# Altium PCB Dionysus.PcbDoc (part 2 of 2)
Units mil, origin at the board's own origin, x right, y up, seen from the top; angles counter-clockwise.
Board outline 4100 x 2100 mil, 4 copper layers (Component Side, Ground Plane, Power Plane, Solder Side); 123 components, 141 nets, 602 pads, 292 vias.
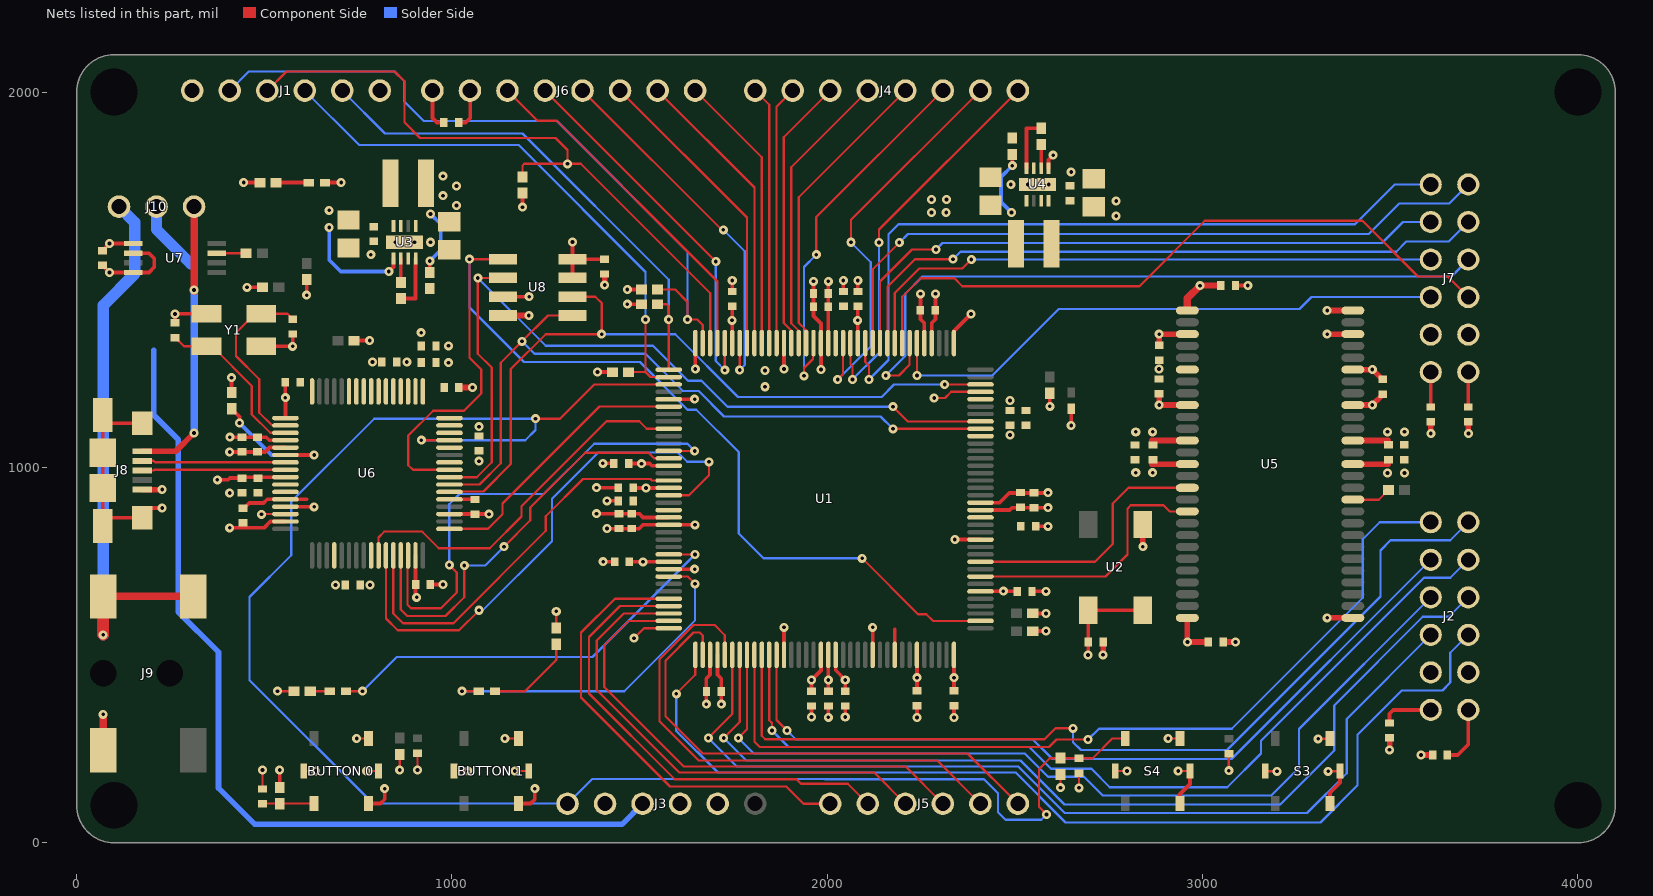
[diagram p4: the nets of this part, all layers, seen from the top]

## Via types
v1: diameter 24, hole 10, Component Side to Solder Side, 288 vias
v2: diameter 24, hole 10, Component Side to Solder Side, tented top, 4 vias

## Nets (pads, with @x,y where several pads share a name; then routed paths per layer and width w, separated by ;. In a path a pad name is that pad's centre, name@x,y a point inside that pad or via, vN(x,y) a via of type N, cw(c..) or ccw(c..) an arc to the next point about the centre after c; other vN are vias at no path point) (continued)
GND: "BUTTON 0.5" "BUTTON 0.6" "BUTTON 1.5" "BUTTON 1.6" C1.1 C2.1 C3.1 C4.1 C5.1 C6.1 C7.1 C8.1 C9.1 C10.1 C11.1 C12.1 C13.1 C14.1 C15.1 C16.1 C17.1 C18.1 C19.1 C20.1 C21.1 C22.1 C23.1 C24.1 C25.1 C26.1 C27.1 C28.1 C29.1 C30.1 C31.1 C32.1 C33.1 C34.1 C35.1 C36.1 C37.1 C38.1 C41.1 C42.1 C43.1 C44.1 C45.1 C46.1 C47.1 C48.1 C49.1 C50.1 C51.1 C52.1 C53.1 C54.1 C55.1 C56.1 C57.1 C58.1 C59.1 C60.1 C61.1 C62.1 C63.1 C64.1 C65.1 C66.1 C67.1 C74.1 C75.1 J1.6 J2.5 J2.11 J3.2 J3.3 J6.7 J7.5 J7.11 J8.5 J8.S J9.2 LED3.2 LED_POWER.2 R1.2 R2.2 R3.1 R4.1 R6.2 R13.2 R21.2 S3.3 S3.4 S3.5 S3.6 S4.3 S4.4 S4.5 S4.6 U1.3 U1.13 U1.25 U1.49 U1.54 U1.68 U1.73 U1.77 U1.91 U1.96 U1.108 U1.113 U1.130 U1.136 U1.144 U2.2 U3.2 U3.3 U3.9 U4.2 U4.3 U4.9 U5.6 U5.12 U5.28 U5.41 U5.46 U5.52 U5.54 U6.1 U6.5 U6.10 U6.11 U6.13 U6.15 U6.25 U6.35 U6.47 U6.51 U7.5 U8.4 Y1.2 Y1.4 | length 5857.2
  Component Side w6: C2.1@495.17,143.44 v1(495.17,193.76) ; v1(535,404) R1.2@579.35,404 ; 605.59,191 v1(637,191) ; v1(773,191) 804.41,191 ; v1(861,194) R3.1@861,235.35 ; v1@908,188.66 908.35,188.66 C1.1@908.35,238.63 ; 1005.59,191 v1@1042.43,191 ; v1@1167.57,191 1204.41,191 ; R2.2@1278,572.31 v1(1278,616.65) ; v1(1485,545) 1511.51,571.51 U1.144@1577.65,571.51 ; v1(2670.77,146.26) C75.1@2670.77,185.57 ; S4.5@2767.59,191 v1(2799,191) ; v1(2908.43,277.61) S4.4@2939.83,277.61 ; v1(2935,191) S4.6@2966.41,191 ; v1(3070,192) C74.1@3070,237.63 ; S3.5@3167.2,190.39 v1(3198.61,190.39) ; v1(3308.04,277) S3.4@3339.45,277 ; v1(3334.61,190.39) S3.6@3366.02,190.39
  Component Side w10: C52.1@69,1577.69 v1(87.7,1596.39) U7.5@150.78,1596.39 ; J8.S@69.69,844.36 J8.S@69.69,944.76 J8.S@69.69,1039.24 J8.S@69.69,1117.98 ; J8.S@71.7,866.02 J8.S@175,866.02 200.98,892 v1(228,892) ; J8.S@76.7,1117.98 J8.S@175,1117.98 ; C51.1@262,1385.68 v1(262,1409) ; v1@262.31,1409.31 Y1.2@346.17,1409.31 ; v1(408,839) 499,839 516.05,856.05 U6.15@556.5,856.05 ; v1(408,1041) 502,1041 513.9,1052.9 U6.5@556.5,1052.9 ; R13.2@413,1199.65 v1(413,1239) ; Y1.4@491.83,1322.69 v1(575.69,1322.69) ; R4.1@541,147.31 v1(541,194) ; v1(556,1186) C61.1@556,1226.69 ; U6.13@556.5,895.42 v1@627.58,895.42 ; U6.1@556.5,1131.64 v1@556.5,1179.5 ; v1@576,1323 C50.1@576,1356 ; LED_POWER.2@661.65,1759 v1(705,1759) ; R6.2@863.91,1493.75 U3.2@863.91,1556.69 ; C55.1@942.68,688 v1(976.37,688) ; U6.35@993.5,875.73 v1@1099,875.73 ; C28.1@1018,1919 1036.63,1919 1048.63,1931 J6.7@1048.63,2004 ; v1(1384.91,946) C4.1@1443.32,946 ; v1(1402.09,1010.91) C3.1@1431.41,1010.91 ; v1@1403.32,748.68 C5.1@1433.63,748.68 ; v1(1413,837) 1419,837 1499.04,836.98 1509.16,847.1 U1.130@1577.65,847.1 v1@1647.9,847.1 ; v1(1413,911) C15.1@1443.32,911 ; U1.136@1577.65,728.99 v1(1647,728.99) ; U1.113@1577.65,1181.75 v1(1647,1181.75) ; v1(1648.51,1262) U1.108@1648.51,1331.35 ; v1(1677.76,369.31) 1677.76,437.31 1687.88,447.43 U1.3@1687.88,500.65 ; C20.1@1746.94,1468.69 v1(1746.94,1498) ; U1.13@1884.73,500.65 v1@1884.73,574 ; v1(1884.73,1262) U1.96@1884.73,1331.35 ; v1(1958,335) C27.1@1958,364.31 ; v1@1963.09,1490.04 v1(1963.09,1496.04) ; v1@1963.35,1496.04 1963.35,1403.65 1983.16,1383.84 U1.91@1983.16,1331.35 v1@1983.16,1261.1 ; v1(2003,334.31) C16.1@2003,365 ; C18.1@2043,1468.69 v1(2043,1498) ; v1(2048,335) C13.1@2048,364.31 ; C14.1@2081.58,1468.69 v1(2081.58,1498) ; U1.25@2120.95,500.65 v1(2121,574) v1(2121,574) ; v1(2239.06,334) C25.1@2239.06,365.32 ; v1(2248.63,1462.69) 2248.63,1394.69 2258.75,1384.57 U1.77@2258.75,1331.35 ; v1(2337.49,334) C11.1@2337.49,365.32 ; U1.73@2337.49,1331.35 2337.49,1363.49 v1(2383,1409) ; v1(2340.01,807.73) U1.49@2408.35,807.73 ; U1.54@2408.35,906.16 2459.16,906.16 2485,932 v1@2588,932 ; C21.1@2545.68,669.94 2582.94,669.94 v1(2583,670) ; C17.1@2555.42,843.31 v1@2586.74,843.31 ; U4.2@2570.09,1797.31 R21.2@2570.09,1860.25 ; v1(2650,1112) LED3.2@2650,1156.35 ; S4.3@2939.83,104.39 2939.83,129.83 2966.41,156.41 S4.6@2966.41,191 ; C41.1@3087.89,1484.61 v1(3120.69,1484.61) ; S3.3@3339.45,103.77 3339.45,133.45 3366.02,160.02 S3.6@3366.02,190.39
  Component Side w15: J8.5@175,940.82 227.82,940.82 v1(228,941) ; C62.1@1018.68,1213 v1(1055,1213) ; U8.4@1136.48,1405 v1(1205,1405) ; v1(1407,1486) C67.1@1407,1515.31 ; v1@2735.02,500 C24.1@2735.02,534.66 ; v1(2840.83,789) U2.2@2840.83,848.17 ; 2865,1071.72 U5.12@2959.57,1071.72 ; C43.1@3054.71,534.98 v1(3087.51,534.98) ; v1(3332.18,599.28) U5.28@3400.52,599.28 ; v1(3332.18,1355.19) U5.52@3400.52,1355.19 ; v1(3332.18,1418.18) U5.54@3400.52,1418.18 ; U5.41@3400.52,1008.73 3495.09,1008.73 ; U5.46@3400.52,1166.21 v1(3452.21,1166.21) C48.1@3480.66,1194.66 ; v1(3498.32,247.63) C29.1@3498.32,278.94 ; v1(3581.68,234) C30.1@3613,234 ; v1(3608.32,1090.31) C31.1@3608.32,1121.63 ; v1(3708.32,1090.31) C32.1@3708.32,1121.63
  Component Side w20: J9.2@71,246.75 v1(71,342.39)
  other v1: 1042.43,190.61 1167.57,191.39 908.35,194 2734.68,500.69 1885,574 781.57,687 1403,749 2588,843 1647.8,847.2 1099,875.31 633,895 408,932 2588,932.69 3493.09,985.46 3538.09,985.46 2822,1095 2867,1095 1072,1108.69 2486.85,1178.48 1983.25,1261.2 2884,1262 991,1279 880,1281 991,1324 784,1567 943,1600 2489,1754 2650,1787
  other v2: 850,1600 900,1600 2535,1754 2590,1754
GPIOH0: U6.48
GPIOH1: U6.52
GPIOH2: U6.53
GPIOH3: U6.54
GPIOH4: U6.55
GPIOH5: U6.57
GPIOH6: U6.58
GPIOH7: U6.59
GPIOL1: U6.44
GPIOL2: C75.2 J3.6 R26.2 S4.1 U1.111 U6.45 | length 4838.8
  Component Side w6: v1(918.42,1072.58) U6.45@993.5,1072.58 ; v1(1223,1130) 1288,1130 1379,1221 U1.111@1577.65,1221 ; v1@2584.5,75.5 2564,96 2564,196 2592.94,224.94 C75.2@2670.77,224.94 ; C75.2@2670.77,225.26 2707.26,225.26 2759.61,277.61 S4.1@2794.17,277.61
  Solder Side w6: v1(918.42,1072.58) 1195.58,1072.58 1223,1100 v1(1223,1130) ; v1@1224,1130 v1(1223,1130) ; v1(2584,75) 2570,61 2475,61 2455,81 2455,132 2418,169 1994.75,169 1993.75,170 1374,170 1308.39,104.39 789.61,104.39 461,433 461,655 572,766 572,909 793,1130 v1(1223,1130)
GPIOL3: U6.46
LED0: "LED 0.1" U1.134 | length 1151.2
  Component Side w6: 717.65,404 v1(762,404) ; U1.134@1577.65,768.36 v1(1647.8,768.36)
  Solder Side w6: v1(762,404) 853,495 1374.44,495 v1(1647.8,768.36)
LED1: "LED 1.1" U1.137 | length 919
  Component Side w6: v1(1027,404) 1071.35,404 ; U1.137@1577.65,709.31 1628.69,709.31 v1(1648,690)
  Solder Side w6: v1(1027,404) 1459,404 1648,593 v1(1648,690)
"NetBUTTON 0_2": "BUTTON 0.2" C2.2 R4.2 | length 137.2
  Component Side w6: C2.2@495,104.39 632.17,104.39
NetC50_2: C50.2 U6.2 Y1.1 | length 483.5
  Component Side w6: Y1.1@475.31,1409.31 425,1359 425,1297 487,1235 487,1146 521,1112 542,1112 542.05,1111.95 U6.2@556.5,1111.95 ; Y1.1@491.83,1409.31 561.69,1409.31 C50.2@576,1395
NetC51_2: C51.2 U6.3 Y1.3 | length 428.7
  Component Side w6: C51.2@262.5,1346.5 286.31,1322.69 Y1.3@346.17,1322.69 ; Y1.3@361.31,1322.69 467,1217 467,1141 515.73,1092.27 U6.3@556.5,1092.27
NetJ9_1: J9.1 J10.1 | length 1535.6
  Component Side w20: J9.1@71,656.2 J9.1@311.16,656.2
  Component Side w30: v1(71,554) J9.1@71,656.2
  Solder Side w30: v1@70.92,554 70.92,1431.92 155,1516 155,1653 J10.1@113,1695
NetL1_1: L1.1 U3.7
NetL2_1: L2.1 U4.7
"NetLED 0_2": "LED 0.2" R1.1 | length 51.7
  Component Side w6: R1.1@622.65,404 674.35,404
"NetLED 1_2": "LED 1.2" R2.1 | length 239.7
  Component Side w6: 1114.65,404 1195,404 1278,487 R2.1@1278,529
NetLED_POWER_1: LED_POWER.1 R29.2 | length 86.7
  Component Side w10: R29.2@531.65,1759 LED_POWER.1@618.35,1759
NetR5_2: R5.2 R6.1 U3.4 | length 145.6
  Component Side w10: R6.1@864.35,1450 903.28,1450 U3.4@903.28,1556.69
NetR11_1: R11.1 U5.38 | length 105.1
  Component Side w6: U5.38@3400.52,914.24 3469.24,914.24 R11.1@3495,940
NetR13_1: R13.1 U6.6 | length 346.8
  Component Side w10: R13.1@413,1156.35 434.31,1135.04 v1(434.31,1118.31) ; U6.6@556.5,1033.21 v1@627.79,1033.21
  Solder Side w10: v1(434.31,1118.31) 519.61,1033 v1@627.57,1033
  other v1: 633,1033
NetR17_2: R17.2 U7.3 | length 80
  Component Side w6: U7.3@373.22,1570.59 R17.2@453.22,1570.59
NetR19_2: R19.2 R21.1 U4.4 | length 145.6
  Component Side w10: U4.4@2530.72,1797.31 2530.72,1904 R21.1@2569.65,1904
O\E\: U1.114 U6.33 | length 736
  Component Side w6: U6.33@993.5,836.36 1096.36,836.36 1135,875 1135,904 1393.06,1162.06 U1.114@1577.65,1162.06
PMODA1: J2.1 U1.9 | length 2378.9
  Component Side w6: U1.9@1805.99,500.65 1805.99,269.01 1820,255 2591,255 2611,275 v1(2695,275)
  Solder Side w6: v1(2695,275) 2724,304 3078,304 3427,653 3427,809 3472,854 J2.1@3608,854
PMODA2: J2.2 U1.12 | length 2179.7
  Component Side w6: U1.12@1865.05,500.65 1865.05,326.95 v1(1893,299)
  Solder Side w6: v1(1893,299) 1916,276 2547,276 2600,223 3077,223 J2.2@3608,754
PMODA3: J2.3 U1.8 | length 2418.7
  Component Side w6: v1(1763,279) 1786.31,302.31 U1.8@1786.31,500.65
  Solder Side w6: v1(1763,279) 1804,238 2526,238 2588,176 2684,176 2734,126 3183,126 3257,200 3257,303 J2.3@3608,654
PMODA4: J2.4 U1.6 | length 2537.7
  Component Side w6: v1(1683,279) 1746.94,342.94 U1.6@1746.94,500.65
  Solder Side w6: v1(1683,279) 1759,203 2509,203 2633,79 3278,79 3384,185 3384,330 J2.4@3608,554
PMODA7: J2.7 U1.10 | length 2482.7
  Component Side w6: U1.10@1825.68,500.65 1825.68,285.32 1835,276 2579,276 2608,305 v1(2655,305)
  Solder Side w6: v1(2655,305) 2655,268 2676,247 3065,247 3474,656 3474,779 3501,806 3660,806 J2.7@3708,854
PMODA8: J2.8 U1.11 | length 2393.3
  Component Side w6: U1.11@1845.36,500.65 1845.36,326.64 1853,319 v1(1853,299)
  Solder Side w6: v1(1853,299) 1897,255 2538,255 2596,197 2704,197 2753,148 3066,148 3156,238 3156,272 3590,706 3660,706 J2.8@3708,754
PMODA9: J2.9 U1.7 | length 2595.6
  Component Side w6: v1(1724,279) 1766.62,321.62 U1.7@1766.62,500.65
  Solder Side w6: v1(1724,279) 1784,219 2515,219 2632,102 3207,102 3351,246 3351,366 3587,602 3656,602 J2.9@3708,654
PMODA10: J2.10 U1.1 | length 2767.1
  Component Side w6: v1(1598,397) 1648.51,447.51 U1.1@1648.51,500.65
  Solder Side w6: v1(1598,397) 1598,298 1709,187 2502,187 2635,54 3314,54 3413,153 3413,288 3531,406 3639,406 3660,427 3660,506 J2.10@3708,554
PMODB1: J7.1 U1.85 | length 2010
  Component Side w6: U1.85@2101.27,1331.35 2101.27,1280.73 2111,1271 v1(2111,1234)
  Solder Side w6: v1(2111,1234) 2163,1286 2163,1621 2190,1648 3406,1648 3512,1754 J7.1@3608,1754
PMODB2: J7.2 U1.83 | length 1697.2
  Component Side w6: U1.83@2140.64,1331.35 2140.64,1495.64 2226,1581 v1(2290,1581)
  Solder Side w6: v1(2290,1581) 2307,1598 3478,1598 3534,1654 J7.2@3608,1654
PMODB3: J7.3 U1.81 | length 1598.5
  Component Side w6: U1.81@2180.01,1331.35 2180.01,1465.01 2245,1530 2360,1530 v1(2384,1554)
  Solder Side w6: v1(2384,1554) J7.3@3608,1554
PMODB4: J7.4 U1.78 | length 1542
  Component Side w6: v1(2239.06,1244.9) U1.78@2239.06,1331.35
  Solder Side w6: v1(2239.06,1244.9) 2439.9,1244.9 2617,1422 3258,1422 3290,1454 J7.4@3608,1454
PMODB7: J7.7 U1.84 | length 1877.3
  Component Side w6: U1.84@2120.95,1331.35 2120.95,1527.95 v1(2192,1599)
  Solder Side w6: v1(2192,1599) 2215,1622 3443,1622 3524,1703 3657,1703 J7.7@3708,1754
PMODB8: J7.8 U1.82 | length 1769.2
  Component Side w6: U1.82@2160.32,1331.35 2160.32,1481.32 2234,1555 v1(2335,1555)
  Solder Side w6: v1(2335,1555) 2355,1575 3516,1575 3543,1602 3656,1602 J7.8@3708,1654
PMODB9: J7.9 U1.79 | length 1910.5
  Component Side w6: v1(2156,1244.9) 2190.9,1244.9 2219.38,1273.38 U1.79@2219.38,1331.35
  Solder Side w6: v1(2156,1244.9) 2208,1296.9 2208,1463 2254,1509 3663,1509 J7.9@3708,1554
PMODB10: J7.10 U1.80 | length 1816.9
  Component Side w6: U1.80@2199.69,1331.35 2199.69,1454.69 2249,1504 2339,1504 2360,1483 2832,1483 3006,1657 3426,1657 3574,1509 3653,1509 J7.10@3708,1454
R\A\S\: U1.44 U5.18 | length 708
  Component Side w6: U1.44@2408.35,709.31 2741.31,709.31 2800,768 2800,890 2809,899 2896,899 2912.25,882.75 U5.18@2959.57,882.75
R\D\: U1.124 U6.28 | length 1082.4
  Component Side w6: U6.28@843.9,765.5 843.9,611.1 870,585 1004,585 1250,831 1250,870 1349,969 1529,969 1532.79,965.21 U1.124@1577.65,965.21
R\X\F\: U1.117 U6.26 | length 1009.9
  Component Side w6: U6.26@804.53,765.5 804.53,813.53 820,829 921,829 965,785 1101,785 1185.5,869.5 1185.5,896.5 1412,1123 1499,1123 1518.99,1103.01 U1.117@1577.65,1103.01
S0: J4.1 U1.87 | length 1053
  Component Side w6: U1.87@2061.9,1331.35 2061.9,1275.1 2067,1270 v1(2067,1234) ; v1(2138,1599) 2138,1634 J4.1@2508,2004
  Solder Side w6: v1(2067,1234) 2138,1305 2138,1597 v1@2140,1599
S1: J4.2 U1.88 | length 1074.5
  Component Side w6: v1(2028,1234) 2042.21,1248.21 U1.88@2042.21,1331.35 ; v1(2063,1600) 2063,1659 J4.2@2408,2004
  Solder Side w6: v1(2028,1234) 2116,1322 2116,1547 v1(2063,1600)
S2: J4.3 U1.92 | length 1011.2
  Component Side w6: v1(1938,1244) 1938,1265 1962.25,1289.25 1962.25,1330.13 U1.92@1963.47,1331.35 ; v1(1971,1567) 1971,1667 J4.3@2308,2004
  Solder Side w6: v1(1938,1244) 1938,1534 v1(1971,1567)
S3: J4.4 U1.93 | length 798.5
  Component Side w6: U1.93@1943.79,1331.35 1943.79,1365.21 1924,1385 1924,1720 J4.4@2208,2004
S4: J4.5 U1.94 | length 765.5
  Component Side w6: U1.94@1924.1,1331.35 1924.1,1363.9 1904,1384 1904,1800 J4.5@2108,2004
S5: J4.6 U1.95 | length 732.5
  Component Side w6: U1.95@1904.42,1331.35 1904.42,1364.58 1884,1385 1884,1880 J4.6@2008,2004
S6: J4.7 U1.97 | length 690.4
  Component Side w6: U1.97@1865.05,1331.35 1865.05,1961.05 J4.7@1908,2004
S7: J4.8 U1.98 | length 688.1
  Component Side w6: J4.8@1808,2004 1845.36,1966.64 U1.98@1845.36,1331.35
S8: J6.1 U1.99 | length 746.2
  Component Side w6: J6.1@1648,2004 1825.68,1826.32 U1.99@1825.68,1331.35
S9: J6.2 U1.100 | length 779.5
  Component Side w6: J6.2@1548,2004 1805.99,1746.01 U1.100@1805.99,1331.35
S10: J6.3 U1.101 | length 812.8
  Component Side w6: J6.3@1448,2004 1786.31,1665.69 U1.101@1786.31,1331.35
S11: J6.4 U1.102 | length 1006.4
  Component Side w6: J6.4@1348,2004 v1@1722.94,1629.06 ; v1(1766.62,1259.62) U1.102@1766.62,1331.35
  Solder Side w6: v1(1723,1633) 1780,1576 1780,1273 v1(1766.62,1259.62) v1@1767.94,1260.94
S12: J6.5 U1.104 | length 1015.4
  Component Side w6: J6.5@1248,2004 v1(1703,1549) ; v1(1727.25,1259.25) U1.104@1727.25,1331.35
  Solder Side w6: v1(1703,1549) 1703,1283.5 v1(1727.25,1259.25)
S13: J6.6 U1.105 | length 934.3
  Component Side w6: J6.6@1148,2004 1228,1924 1279,1924 1707.57,1495.43 U1.105@1707.57,1331.35
S14: J5.1 U1.2 | length 1368
  Component Side w6: 1668,552 1660,560 1644,560 1569,485 1569,337 1668,238 2374,238 J5.1@2508,104 ; U1.2@1668.2,500.65 1668.2,551.8
S15: J5.2 U1.5 | length 1386.5
  Component Side w6: U1.5@1727.25,500.65 1727.25,552.75 1700,580 1644,580 1553,489 1553,324 1658,219 2293,219 J5.2@2408,104
S16: J5.3 U1.143 | length 1340.5
  Component Side w6: U1.143@1577.65,591.2 1471.2,591.2 1406,526 1406,415 1618,203 2209,203 J5.3@2308,104
S17: J5.4 U1.142 | length 1300.9
  Component Side w6: U1.142@1577.65,610.88 1457.88,610.88 1386,539 1386,407 1606,187 2125,187 J5.4@2208,104
S18: J5.5 U1.141 | length 1261.6
  Component Side w6: U1.141@1577.65,630.57 1447.57,630.57 1365,548 1365,398 1594,169 1918,169 1930,157 2055,157 J5.5@2108,104
S19: J5.6 U1.140 | length 1225.3
  Component Side w6: U1.140@1577.65,650.25 1434.25,650.25 1344,560 1344,387 1581,150 1891,150 1937,104 J5.6@2008,104
SIWUA: U1.120 U6.30 | length 1325.4
  Component Side w6: U6.30@883.27,765.5 881.95,764.18 881.95,634.05 891,625 971,625 1013,667 1013,720 v1(993,740) ; U1.120@1577.65,1043.95 v1(1647,1043.95)
  Solder Side w6: v1(993,740) 993,902 1020,929 1245,929 1379,1063 1627.95,1063 v1(1647,1043.95)
SPI_CLK: U1.70 U6.38 U8.6 | length 1989.4
  Component Side w6: U6.38@993.5,934.79 994.82,936.1 1084.1,936.1 1157,1009 1157,1262 1250,1355 v1(1399,1355) 1399,1438 1382,1455 U8.6@1321.52,1455 ; v1@2311.12,1221.12 U1.70@2408.35,1221.12
  Solder Side w6: v1(1399,1355) 1595,1355 1762,1188 2145,1188 2178,1221 v1(2313,1221)
SPI_CS: U1.38 U6.41 U8.1 | length 2857.5
  Component Side w6: U6.41@993.5,993.84 896.16,993.84 884,1006 884,1085 950,1151 1032,1151 1078,1197 1078,1261 1047,1292 v1(1047,1555) U8.1@1136.48,1555 ; v1(2093,758) 2242,609 2264,609 2281.8,591.2 U1.38@2408.35,591.2
  Solder Side w6: v1(1047,1555) 1047,1426 1192,1281 1501,1281 1628,1154 1651,1154 1764,1041 1764,824 1830,758 v1(2093,758)
SPI_DI: U1.65 U6.40 U8.2 | length 2200.5
  Component Side w6: U6.40@993.5,974.16 1066.16,974.16 1106,1014 1106,1266 1069,1303 v1(1069,1505) U8.2@1136.48,1505 ; v1(2175,1162) 2214.31,1122.69 U1.65@2408.35,1122.69
  Solder Side w6: v1(1069,1505) 1250,1324 1536,1324 1629,1231 1665,1231 1734,1162 v1(2175,1162)
SPI_DO: U1.64 U6.39 U8.5 | length 1989.5
  Component Side w6: U6.39@993.5,954.47 1073.47,954.47 1130,1011 1130,1279 v1(1187,1336) 1256,1405 U8.5@1321.52,1405 ; v1(2175,1103.01) U1.64@2408.35,1103.01
  Solder Side w6: v1(1187,1336) 1220,1303 1516,1303 1615,1204 1657,1204 1725,1136 2142.01,1136 v1(2175,1103.01)
T\X\E\: U1.126 U6.27 | length 1478.9
  Component Side w6: U6.27@824.21,765.5 824.21,597.79 856,566 1019,566 v1(1072.5,619.5) ; U1.126@1577.65,925.84 1631.84,925.84 1685,979 v1@1685,1014
  Solder Side w6: v1(1072.5,619.5) 1082.5,619.5 1267,804 1267,917 1390,1040 1602,1040 1627,1015 v1(1685,1015)
TCK: J1.2 R24.2 U1.109 | length 1385.5
  Component Side w6: R24.2@1548,1435 1572,1435 1577.65,1429.35 v1(1577.65,1394) U1.109@1577.65,1260.49
  Solder Side w6: J1.2@708,2004 822,1890 1188,1890 1577.65,1500.35 v1(1577.65,1394)
TDI: J1.3 R22.2 U1.110 | length 1487.5
  Component Side w6: R22.2@1470.65,1254 1516,1254 ; v1(1516,1394) 1516,1254 ; U1.110@1577.65,1240.8 1529.2,1240.8 1516,1254
  Solder Side w6: J1.3@608,2004 753,1859 1178,1859 1516,1521 v1(1516,1394)
TDO: J1.4 R25.2 U1.106 | length 1816.2
  Component Side w6: J1.4@508,2004 559,2055 847,2055 874,2028 874,1919 915,1878 1276,1878 1308,1846 v1(1308,1809) ; R25.2@1188,1774 1188,1804 1193,1809 v1(1308,1809) ; U1.106@1687.88,1331.35 1688,1331.47 1688,1464 1343,1809 v1(1308,1809)
TMS: J1.5 R23.2 U1.107 | length 1877.8
  Component Side w6: R23.2@1548,1474 1595,1474 1628,1441 v1@1628,1404 ; v1(1628,1394) 1654,1394 1668.2,1379.8 U1.107@1668.2,1331.35
  Solder Side w6: J1.5@408,2004 459,2055 847,2055 873,2029 873,1975 925,1923 1280,1923 1628,1575 v1(1628,1394)
USB_N: J8.2 U6.7 | length 383.2
  Component Side w6: J8.2@175,1017.59 205,1017.59 209.06,1013.53 U6.7@556.5,1013.53
USB_P: J8.3 U6.8 | length 382.3
  Component Side w6: J8.3@175,992 205,992 206.84,993.84 U6.8@556.5,993.84
USB_V5P0: J8.1 J10.3 | length 761.2
  Component Side w15: J8.1@175,1043.18 264.18,1043.18 v1(313,1092)
  Component Side w20: v1@313,1469 J10.3@313,1695
  Solder Side w20: v1(313,1092) v1@313,1469
  other v1: 313,1473
V1P2: C15.2 C16.2 C17.2 C18.2 C38.2 L2.2 R19.1 U1.19 U1.28 U1.52 U1.89 U1.128 U4.5 | length 344.5
  Component Side w10: v1(2002.84,434) U1.19@2002.84,500.65 ; C16.2@2003,403.69 v1@2003,433.84 ; U1.28@2180.01,500.65 2180.01,568.99 ; v1(2493,1804) R19.1@2493,1834.35
  Solder Side w10: v1(2491,1679) 2463,1707 2463,1774 v1(2493,1804)
  other v1: 1834,1215 1834,1258 2278,1679 2317,1679 2278,1714 2318,1714
V1P8: C59.2 C60.2 C61.2 C62.2 U6.12 U6.37 U6.49 U6.64 | length 237.1
  Component Side w10: C59.2@452,897 460,905 498,905 508.1,915.1 U6.12@556.5,915.1 613.1,915.1 ; U6.37@993.5,915.1 C60.2@1062,915.1
V3P3: "BUTTON 0.3" "BUTTON 0.4" "BUTTON 1.3" "BUTTON 1.4" C3.2 C4.2 C5.2 C6.2 C7.2 C8.2 C9.2 C10.2 C11.2 C12.2 C13.2 C14.2 C19.2 C20.2 C21.2 C22.2 C23.2 C24.2 C25.2 C26.2 C27.2 C28.2 C29.2 C30.2 C31.2 C32.2 C34.2 C36.2 C37.2 C41.2 C42.2 C43.2 C44.2 C45.2 C46.2 C47.2 C48.2 C49.2 C52.2 C53.2 C54.2 C55.2 C56.2 C57.2 C58.2 C63.2 C64.2 C65.2 C66.2 C67.2 J1.1 J2.6 J2.12 J3.5 J6.8 J7.6 J7.12 L1.2 R5.1 R7.1 R8.1 R9.1 R14.1 R15.1 R16.1 R22.1 R23.1 R24.1 R25.1 R26.1 R29.1 U1.4 U1.18 U1.20 U1.31 U1.36 U1.42 U1.53 U1.63 U1.69 U1.76 U1.86 U1.90 U1.103 U1.122 U1.125 U1.129 U1.135 U2.1 U2.4 U3.5 U4.1 U4.8 U5.1 U5.3 U5.9 U5.14 U5.27 U5.43 U5.49 U6.4 U6.9 U6.14 U6.20 U6.31 U6.42 U6.50 U6.56 U7.6 U7.8 U8.3 U8.7 U8.8 | length 5451.4
  Component Side w6: v1@493,875.73 U6.14@556.5,875.73 ; v1(746.43,277.61) 777.83,277.61 ; v1@1141,277.61 1177.83,277.61 ; v1(2285,1185) 2314,1185 2330.43,1201.43 U1.69@2408.35,1201.43 ; v1@2621.43,147 R26.1@2621.43,182.23
  Component Side w10: C52.2@69,1538.31 v1(87.7,1519.61) U7.8@150.78,1519.61 192.61,1519.61 207,1534 207,1557 193.2,1570.8 U7.6@150.78,1570.8 ; v1@385,967 404,967 408.68,971.69 C64.2@441,971.69 ; v1(408.32,1080.69) C65.2@441,1080.69 C66.2@482,1080.69 505.32,1080.69 513.42,1072.58 U6.4@556.5,1072.58 ; C64.2@434,974 434.16,974.16 U6.9@556.5,974.16 ; v1(445.35,1759) R29.1@488.69,1759 ; v1(454,1480) R15.1@495.35,1480 ; v1(613,1459) R14.1@613,1500.35 ; R16.1@739.65,1338 v1(781,1338) ; 777.83,104.39 809.39,104.39 821,116 v1(821,144) ; v1@902.95,654.05 U6.31@902.95,765.5 ; R5.1@941,1519.65 v1(941,1550) ; J6.8@948,2004 948,1931 960,1919 C28.2@978.63,1919 ; U8.3@1136.48,1455 v1(1206,1455) ; 1177.83,104.39 1209.39,104.39 1221,116 v1(1221,144) ; v1(1188,1693.35) R25.1@1188,1730.69 ; U8.7@1321.52,1505 U8.8@1321.52,1555 v1(1321.52,1600.48) ; U8.8@1321.83,1554.69 C67.2@1407,1554.69 ; v1(1384.91,876.91) 1499.04,876.91 1509.16,866.79 U1.129@1577.65,866.79 ; v1(1388,1254) R22.1@1427.35,1254 ; v1(1467.35,1435) R24.1@1504.69,1435 ; v1(1467.35,1474) R23.1@1504.69,1474 ; C3.2@1470.09,1010.49 1526.51,1010.49 1532.42,1004.58 U1.122@1577.65,1004.58 ; C5.2@1473,748.68 U1.135@1577.65,748.68 ; C4.2@1480,945.53 U1.125@1577.65,945.53 ; U1.4@1707.57,500.65 1707.57,447.43 1717.68,437.31 C26.2@1717.68,403 v1(1717.68,369.31) ; U1.103@1746.94,1331.35 C20.2@1746.94,1429 ; C27.2@1958,403.69 v1(1958,434) 1983.16,459.16 U1.18@1983.16,500.65 ; U1.90@2002.84,1331.35 v1(2002.84,1496.04) 2003.09,1496.04 v1@2003,1495.94 ; U1.20@2022.53,500.65 2022.53,459.47 v1(2048,434) C13.2@2048,403.69 ; U1.86@2081.58,1331.35 C14.2@2081.58,1429 ; C25.2@2239.06,404.69 U1.31@2239.06,500.65 ; U1.76@2278.43,1331.35 2278.43,1384.57 2288.55,1394.69 v1(2288.55,1462.69) ; C11.2@2337.49,404.69 U1.36@2337.49,500.65 ; U1.42@2408.35,669.94 C21.2@2506,669.94 ; U1.53@2408.35,886.47 2486.47,886.47 2492.68,892.69 v1(2588,892.69) ; R9.1@2547.65,564 v1(2583,564) ; R8.1@2547.65,611 v1(2583,611) ; v1@2586.7,893.04 v1@2586.74,893 ; U4.1@2589.78,1797.31 2589.78,1819.78 v1(2602,1832) ; v1(2593,1163) R7.1@2593,1197.69 ; v1@2695.34,500 2695.34,534.98 2695.17,535.15 U2.4@2695.17,619.83 U2.1@2840.83,619.83 ; C29.2@3498,319 3498,344 3508,354 J2.6@3608,354 ; C31.2@3608,1161.31 J7.6@3608,1254 ; C30.2@3652.37,234 3680,234 3708,262 J2.12@3708,354 ; C32.2@3708,1161.31 J7.12@3708,1254
  Component Side w15: 2865,1008.73 U5.14@2959.57,1008.73 ; C46.2@2884.4,1196.34 v1(2884.4,1166.21) U5.9@2959.57,1166.21 ; C45.2@2884.4,1325.06 v1(2884.4,1355.19) U5.3@2959.57,1355.19 ; U5.27@2959.57,599.28 v1(2959.57,534.98) C43.2@3015.34,534.98 ; v1@2993.67,1484.61 C41.2@3048.52,1484.61 ; U5.43@3400.52,1071.72 3495.09,1071.72 ; U5.49@3400.52,1260.7 v1(3452.3,1260.7) C48.2@3479.16,1233.84
  Component Side w20: U5.1@2959.57,1418.18 2959.57,1450.51 v1(2993.18,1484.12)
  Solder Side w10: v1(941,1550) 970,1579 970,1648 v1(943,1675)
  other v1: 2621.43,146.88 1141,278 2239.5,439.91 2337.92,439.91 2695,500 906,654 2469.09,670.37 689.69,687 1509.16,748.68 493,875 1516.91,945.09 375,967 2822,986 2867,986 1505,1010 1072,1016.8 2486.85,1086.59 3493.09,1095 3538.09,1095 788.11,1281 918,1359 1746.5,1392.09 2081.15,1392.09 2770,1670 1012,1698 2770,1710 976,1724 1012,1750 976,1776
V5P0: C33.2 C35.2 J3.4 J10.2 U3.1 U3.8 | length 2924.5
  Component Side w10: v1(832,1522) 844.22,1534.22 U3.1@844.22,1556.69
  Solder Side w10: v1@673,1646 673,1553 704,1522 v1(832,1522)
  Solder Side w15: 206,1312 206,1139 271,1074 271,615 378,508 378,146 475,49 1453,49 J3.4@1508,104
  Solder Side w30: J10.2@213,1695 213,1634 304,1543
  other v1: 673,1639 673,1685
W\E\: U1.46 U5.16 | length 696.1
  Component Side w6: U1.46@2408.35,748.68 2713.68,748.68 2761,796 2761,904 2802.74,945.74 U5.16@2959.57,945.74
W\R\: U1.121 U6.29 | length 1121.3
  Component Side w6: U6.29@863.58,765.5 863.58,621.42 881,604 983,604 1033,654 v1(1033,739) ; v1(1139,789) 1209,859 1209,893 1355,1039 1524,1039 1538.73,1024.27 U1.121@1577.65,1024.27
  Solder Side w6: v1(1033,739) 1089,739 v1(1139,789)
pads on no net: "BUTTON 1.2" J3.1 J8.4 J9. J9.3 MNT1.MOUNT MNT2.MOUNT MNT3.MOUNT MNT4.MOUNT S3.2 S4.2 U1.72 U1.112 U3.6 U4.6 U5.36 U5.40 U6.36 U6.60 U7.7

## Polygon pours and split planes (outlines as drawn)
GND on Ground Plane (split plane): 4007.84,2079.61 4015.61,2078.46 4023.22,2076.55 4030.61,2073.91 4037.71,2070.55 4044.44,2066.51 4050.75,2061.84 4056.57,2056.57 4061.84,2050.75 4066.51,2044.44 4070.55,2037.71 4073.91,2030.61 4076.55,2023.22 4078.46,2015.61 4079.61,2007.84 4079.97,2000.63 4079.9,2000 4079.9,100 4079.97,99.37 4079.61,92.16 4078.46,84.39 4076.55,76.78 4073.91,69.39 4070.55,62.29 4066.51,55.56 4061.84,49.25 4056.57,43.43 4050.75,38.16 4044.44,33.49 4037.71,29.45 4030.61,26.09 4023.22,23.45 4015.61,21.54 4007.84,20.39 4000.63,20.03 4000,20.1 100,20.1 99.37,20.03 92.16,20.39 84.39,21.54 76.78,23.45 69.39,26.09 62.29,29.45 55.56,33.49 49.25,38.16 43.43,43.43 38.16,49.25 33.49,55.56 29.45,62.29 26.09,69.39 23.45,76.78 21.54,84.39 20.39,92.16 20.03,99.37 20.1,100 20.1,2000 20.03,2000.63 20.39,2007.84 21.54,2015.61 23.45,2023.22 26.09,2030.61 29.45,2037.71 33.49,2044.44 38.16,2050.75 43.43,2056.57 49.25,2061.84 55.56,2066.51 62.29,2070.55 69.39,2073.91 76.78,2076.55 84.39,2078.46 92.16,2079.61 99.37,2079.97 100,2079.9 4000,2079.9 4000.63,2079.97
V3P3 on Power Plane (split plane): 4007.84,2079.61 4015.61,2078.46 4023.22,2076.55 4030.61,2073.91 4037.71,2070.55 4044.44,2066.51 4050.75,2061.84 4056.57,2056.57 4061.84,2050.75 4066.51,2044.44 4070.55,2037.71 4073.91,2030.61 4076.55,2023.22 4078.46,2015.61 4079.61,2007.84 4079.97,2000.63 4079.9,2000 4079.9,100 4079.97,99.37 4079.61,92.16 4078.46,84.39 4076.55,76.78 4073.91,69.39 4070.55,62.29 4066.51,55.56 4061.84,49.25 4056.57,43.43 4050.75,38.16 4044.44,33.49 4037.71,29.45 4030.61,26.09 4023.22,23.45 4015.61,21.54 4007.84,20.39 4000.63,20.03 4000,20.1 100,20.1 99.37,20.03 92.16,20.39 84.39,21.54 76.78,23.45 69.39,26.09 62.29,29.45 55.56,33.49 49.25,38.16 43.43,43.43 38.16,49.25 33.49,55.56 29.45,62.29 26.09,69.39 23.45,76.78 21.54,84.39 20.39,92.16 20.03,99.37 20.1,100 20.1,2000 20.03,2000.63 20.39,2007.84 21.54,2015.61 23.45,2023.22 26.09,2030.61 29.45,2037.71 33.49,2044.44 38.16,2050.75 43.43,2056.57 49.25,2061.84 55.56,2066.51 62.29,2070.55 69.39,2073.91 76.78,2076.55 84.39,2078.46 92.16,2079.61 99.37,2079.97 100,2079.9 4000,2079.9 4000.63,2079.97

## Other copper
Component Side:
  region net V3P3: 3480.09,1050 3552.09,1050 3552.09,1101.46 3544.09,1109.46 3487.09,1109.46 3480.09,1102.46
  region net GND: 3480.09,1030.46 3552.09,1030.46 3552.09,979 3544.09,971 3487.09,971 3480.09,978
  region net GND: 2880,1050 2808,1050 2808,1101.46 2816,1109.46 2873,1109.46 2880,1102.46
  region net V3P3: 2880,1030.46 2808,1030.46 2808,979 2816,971 2873,971 2880,978
  region net GND: 2873,1296 2873,1226 2896,1226 2896,1243 2903,1250 2960,1250 2960,1271 2902,1271 2896,1277 2896,1296
  region net V3P3: 2408.35,1078.59 2522.52,1078.59 2542,1098.07 2542,1123.59 2474.85,1123.59 2474.85,1103.59 2459.85,1088.59 2408.35,1088.59
  region net GND: 2408.35,1186.48 2522.52,1186.48 2542,1167 2542,1141.48 2474.85,1141.48 2474.85,1161.48 2459.85,1176.48 2408.35,1176.48
  region net V1P8: 918,1234 979,1234 988,1225 988,1199 962,1173 918,1173
  region net GND: 948,1264 948,1339 953,1344 993,1344 1008,1329 1008,1279 993,1264
  region net V3P3: 898,1202 898,1256 908,1266 908,1364 913,1369 923,1369 928,1364 928,1268 909,1249 909,1202
  region net GND: 789.57,744 789.57,684 780.57,675 744.57,675 744.57,699 764.57,699 779.57,714 779.57,744
  region net V3P3: 681.69,744 681.69,684 690.69,675 726.69,675 726.69,699 706.69,699 691.69,714 691.69,744
  region net GND: 1015,1116.69 1075,1116.69 1084,1107.69 1084,1071.69 1060,1071.69 1060,1091.69 1045,1106.69 1015,1106.69
  region net V3P3: 1015,1008.8 1075,1008.8 1084,1017.8 1084,1053.8 1060,1053.8 1060,1033.8 1045,1018.8 1015,1018.8
  region net V3P3: 780.11,1224 780.11,1284 789.11,1293 825.11,1293 825.11,1269 805.11,1269 790.11,1254 790.11,1224
  region net GND: 888,1224 888,1284 879,1293 843,1293 843,1269 863,1269 878,1254 878,1224
  region net V1P8: 585,1239 628,1239 633,1234 633,1171 630,1168 609,1168 585,1192
  region net GND: 585,960 513,960 497,944 405,944 398,937 398,929 407,920 493,920 502,929 585,929
  region net V1P8: 585,1239 585,1171 653,1103 653,973 607.68,927.68 607.68,910 618,910 623,915 799,915 823,939 883,939 913,909 978,909 978,921 950,921 871,1000 871,1097 947,1173 962,1173 988,1199 988,1225 979,1234 918,1234 918,1165 907,1154 643,1154 633,1164 633,1234 628,1239
  region net V3P3: 2585,1726 2779,1726 2785,1720 2785,1660 2779,1654 2653,1654 2632,1675 2605,1675 2585,1695
  region net NetL2_1: 2575,1726 2575,1695 2619,1651 2619,1532 2576,1532 2576,1655 2565,1666 2565,1726
  region net V1P2: 2535,1726 2535,1666 2524,1655 2524,1534 2481,1534 2351,1665 2265,1665 2265,1726
  region net GND: 2546,1813 2546,1772 2497,1772 2470,1799 2412,1799 2412,1748 2472,1748 2484,1736 2732,1736 2740,1744 2740,1802 2736,1806 2644,1806 2609,1771 2608,1772 2575,1772 2575,1813
  region net NetR19_2: 2481,1864 2536,1864 2536,1909 2498,1909 2481,1892
  region net NetR5_2: 953,1490 898,1490 898,1445 936,1445 953,1462
  region net GND: 888,1541 888,1582 937,1582 964,1555 1022,1555 1022,1606 962,1606 950,1618 702,1618 694,1610 694,1552 698,1548 790,1548 825,1583 826,1582 859,1582 859,1541
  region net V3P3: 899,1628 899,1688 910,1699 910,1820 953,1820 1030,1743 1030,1628
  region net NetL1_1: 859,1628 859,1659 815,1703 815,1822 858,1822 858,1699 869,1688 869,1628
  region net V5P0: 849,1628 665,1628 658,1635 658,1685 673,1700 755,1700 776,1679 829,1679 849,1659
  region net V1P2: 1486,921 1508,921 1537,892 1660,892 1793,1025 1793,1269 1798,1274 1857,1274 1863,1268 1863,1254 1893,1224 1973,1224 2008,1259 2008,1285 2017,1294 2017,1398 2034,1415 2034,1437 2053,1437 2053,1400 2027,1374 2027,1260 2010,1243 2010,1222 2360,872 2489,872 2506,855 2509,855 2509,830 2492,830 2461,861 2295,861 2231,797 2096,797 2073,773 2073,739 2198,614 2198,552 2185,539 2185,473 2175,473 2174,474 2175,475 2175,538 2148,565 2148,619 2129,638 2072,638 2008,574 2008,476 1997,476 1997,575 1973,599 1973,634 1900,707 1693,707 1693,848 1660.27,881 1520,881 1500,901 1486,901
Solder Side:
  region net V5P0: 864,1701 864,1624 436,1624 233,1421 233,1301 172,1301 172,1461 412,1701
  region net V1P2: 2348,1726 1920,1726 1803,1609 1803,1199 1863,1199 1863,1525 2003,1665 2348,1665

## Silkscreen, mask and mechanical layers (free items; w line width, h text height)
Top Overlay:
  text "Cospan Design" at 3065,1997 h80
  text "D0" at 2613,1982 h30 r90
  text "Dionysus" at 3065,1909.2 h80
  text "C" at 3672,1908 h150
  text "D1" at 2418,1870 h30 r90
  text "D2" at 2319,1863 h30 r90
  text "D13" at 1162,1860 h30 r90
  text "D12" at 1262.2,1860 h30 r90
  text "D11" at 1362.4,1860 h30 r90
  text "D10" at 1462.6,1860 h30 r90
  text "D9" at 1562.8,1860 h30 r90
  text "D8" at 1663,1860 h30 r90
  text "D7" at 1822,1860 h30 r90
  text "D6" at 1921.33,1860 h30 r90
  text "D5" at 2020.67,1860 h30 r90
  text "D4" at 2120,1860 h30 r90
  text "D3" at 2219.33,1860 h30 r90
  text "GND" at 316,1855 h30 r90
  text "TMS" at 418,1855 h30 r90
  text "TDO" at 520,1855 h30 r90
  text "TDI" at 622,1855 h30 r90
  text "TCK" at 724,1855 h30 r90
  text "GND" at 1088,1854 h30 r90
  text "3.3V" at 825,1835 h30 r90
  text "3.3V" at 940,1834 h30 r90
  text "Power Select" at 67,1812 h30
  text "Rev:" at 3065,1807.57 h80
  text ".Revision" at 3270,1807.12 h80
  text "USB" at 236,1767 h30
  text "DC" at 132,1766 h30
  text "SN:________" at 3065,1733 h70
  text "PMOD 2" at 3503,1519 h30 r90
  text "DONE" at 2733,1123 h30 r90
  text "PMOD 1" at 3500,699 h30 r90
  text "XC6SLX9-L1TQG144" at 1289,653 h30 r90
  text "SOFT RESET" at 2722,334 h30
  text "PROGRAM" at 3179,334 h30
  text "D19" at 2024,179 h30 r90
  text "D18" at 2123.6,179 h30 r90
  text "D17" at 2223.2,179 h30 r90
  text "D16" at 2322.8,179 h30 r90
  text "D15" at 2422.4,179 h30 r90
  text "D14" at 2522,179 h30 r90
  text "RESET" at 1314,174 h30 r90
  text "3.3V" at 1414,174 h30 r90
  text "5.0V" at 1514,174 h30 r90
  text "GND" at 1616.5,174 h30 r90
  text "GND" at 1719,174 h30 r90
  text "NC" at 1823,174 h30 r90
  text "5.0V DC" at 216,82 h30
Mechanical 2:
  the board outline again, w10